# EAGLE board PCB_Micromouse_Final (EAGLE 9.7.0)
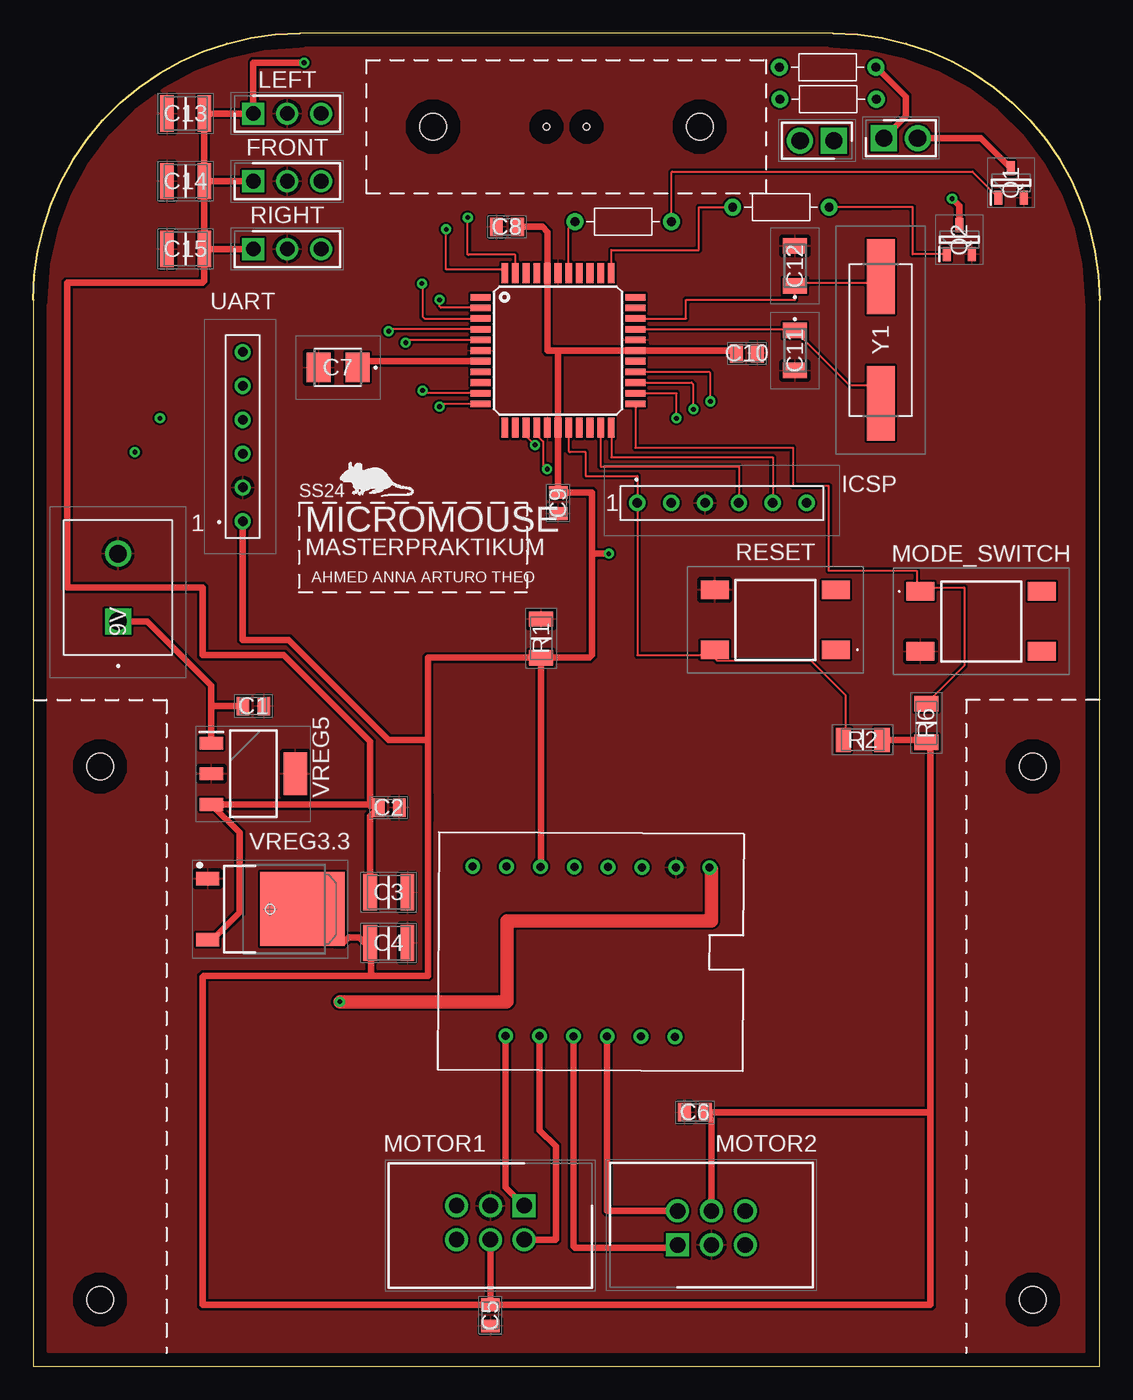
[diagram p0: board, top side]
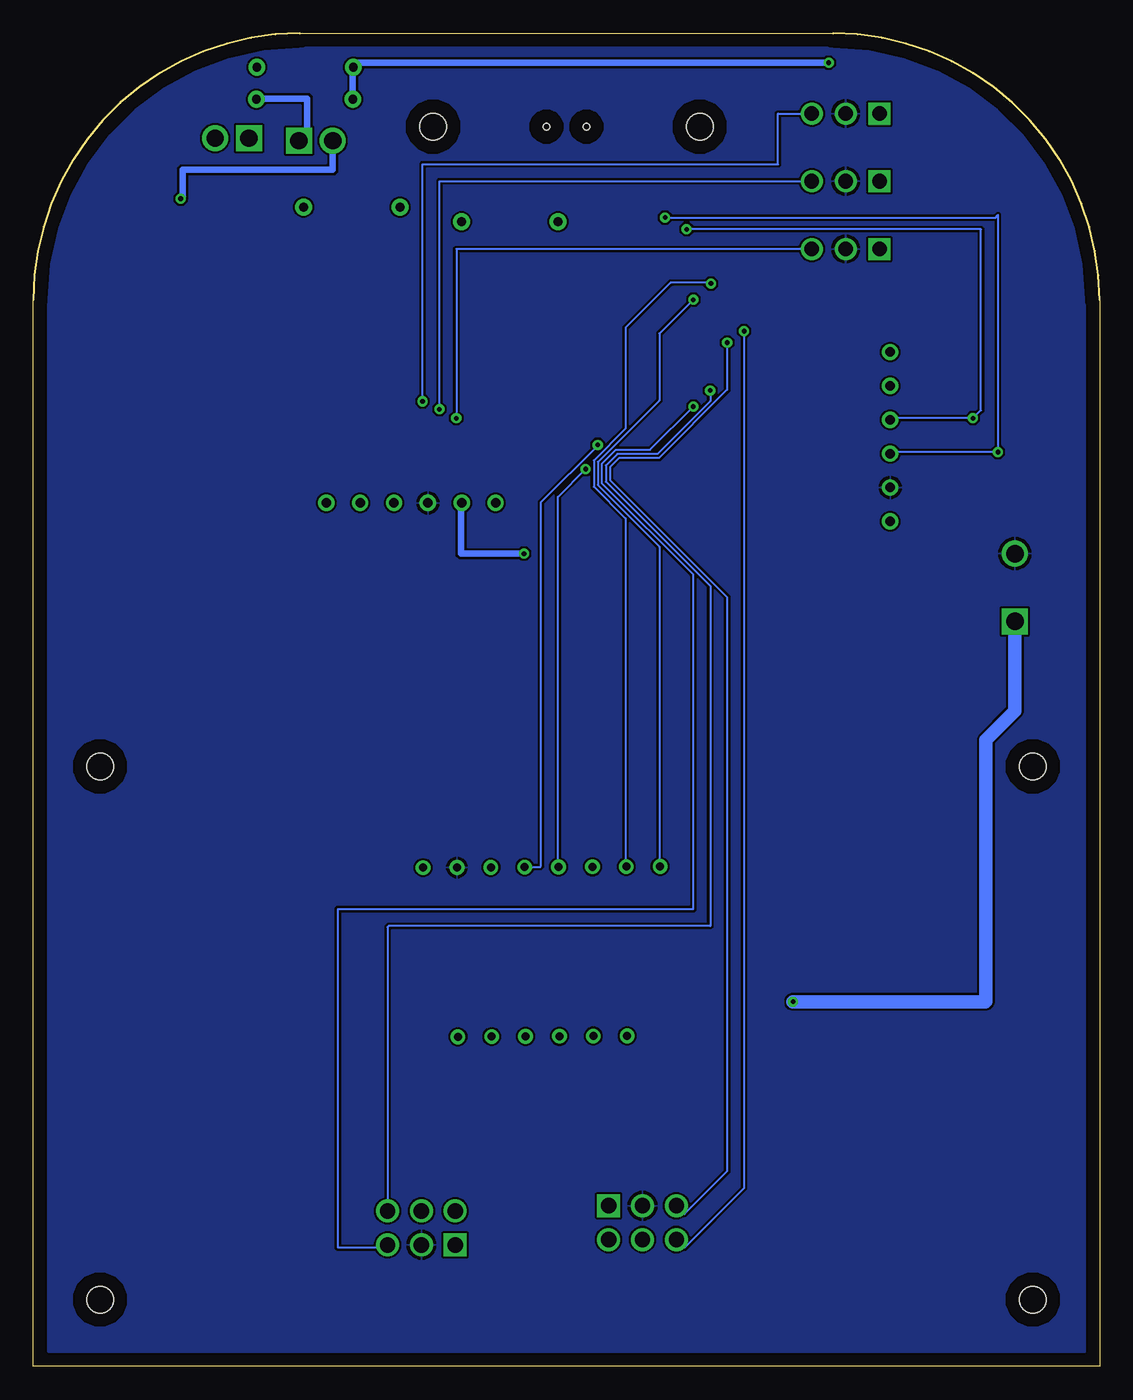
[diagram p1: board, bottom side, seen from below]

Size 80 x 100 mm. Coordinates in mm from the lower left corner, seen from the top.
Outline: 0,0 80,0 80,80 arc90 60,100 20,100 arc90 0,80 0,0
Copper layers (1*16): Top / Bottom
Stack-up Default Layer Stack: Top User Defined 0.035mm / Dielectric-1 User Defined 1.5mm / Bottom User Defined 0.035mm
Design rules: minimum copper width 6mil, minimum drill size 0.35mm, copper clearance wire_polygon to wire_polygon 6mil, copper clearance wire_polygon to pad_smd 6mil, copper clearance wire_polygon to via 6mil, copper clearance pad_smd to pad_smd 6mil, copper clearance pad_smd to via 6mil, copper clearance via to via 6mil, copper clearance smd to pad (same net) 6mil, copper clearance smd to via (same net) 6mil, copper clearance smd to smd (same net) 6mil, dimension clearance 40mil, via restrict clearance 0mil, restrict clearance 0mil, drill distance 6mil, keepout clearance 0mil
Holes 2 mm at 5,45 5,5 30,93 50,93 75,45 75,5
Holes 0.5 mm at 38.5,93 41.5,93

## Footprints (pad centres in the part's own frame; a part is rotated, then mirrored left to right if it is on the bottom)
1729128 = drill 1.3 pad 1.95 square: 1 0,0 | drill 1.3 pad 1.95: 2 5.08,0
CAPC2012X135N = smd 0.96 x 1.39: 1 -0.79,0; 2 0.79,0
CAPC3225X178N = smd 1.02 x 2.72: 1 -1.4,0; 2 1.4,0
T495T = smd 1.8 x 2.23: 1 -1.46,0; 2 1.46,0
C1206 = smd 1.15 x 1.8: 1 -1.5,0; 2 1.5,0
HDRV3W64P0X254_1X3_762X254X869 = drill 1.1 pad 1.65 square: 1 0,0 | drill 1.1 pad 1.65: 2 2.54,0; 3 5.08,0
TQFP44 = smd 1.5 x 0.5: 1 -5.8,4; 2 -5.8,3.2; 3 -5.8,2.4; 4 -5.8,1.6; 5 -5.8,0.8; 6 -5.8,0; 7 -5.8,-0.8; 8 -5.8,-1.6; 9 -5.8,-2.4; 10 -5.8,-3.2; 11 -5.8,-4; 23 5.8,-4; 24 5.8,-3.2; 25 5.8,-2.4; 26 5.8,-1.6; 27 5.8,-0.8; 28 5.8,0; 29 5.8,0.8; 30 5.8,1.6; 31 5.8,2.4; 32 5.8,3.2; 33 5.8,4 | smd 0.5 x 1.5: 12 -4,-5.8; 13 -3.2,-5.8; 14 -2.4,-5.8; 15 -1.6,-5.8; 16 -0.8,-5.8; 17 0,-5.8; 18 0.8,-5.8; 19 1.6,-5.8; 20 2.4,-5.8; 21 3.2,-5.8; 22 4,-5.8; 34 4,5.8; 35 3.2,5.8; 36 2.4,5.8; 37 1.6,5.8; 38 0.8,5.8; 39 0,5.8; 40 -0.8,5.8; 41 -1.6,5.8; 42 -2.4,5.8; 43 -3.2,5.8; 44 -4,5.8
SS-106-XX-2 = drill 0.71 pad 1.1: 1 0,0; 2 -2.54,0; 3 -5.08,0; 4 -7.62,0; 5 -10.16,0; 6 -12.7,0
HDRV2W110P0X254_1X2_508X254X85 = drill 1.3 pad 1.95 square: 1 0,0 | drill 1.3 pad 1.95: 2 2.54,0
TS046695BK160SMTTR = smd 2.1 x 1.4: 1 -4.55,2.25; 2 -4.55,-2.25; 3 4.55,2.25; 4 4.55,-2.25
SHDR6W67P254_2X3_1524X916X922P = drill 1.15 pad 1.725 square: 1 0,0 | drill 1.15 pad 1.725: 2 0,2.54; 3 2.54,0; 4 2.54,2.54; 5 5.08,0; 6 5.08,2.54
SOT95P230X110-3N = smd 1.05 x 0.6: 1 -1.1,0.95; 2 -1.1,-0.95; 3 1.1,0
RESC3216X65N = smd 1.15 x 1.8: 1 -1.45,0; 2 1.45,0
RESAD724W46L381D178B = drill 0.66 pad 1.26: 1 -3.62,0; 2 3.62,0
ADAFRUITPINHEADER = drill 0.6: AIN1 0,0; AIN2 0,2.54; AOUT1 12.7,2.54; AOUT2 12.7,5.08; AS 12.7,12.7; BIN1 0,10.16; BIN2 0,7.62; BOUT1 12.7,7.62; BOUT2 12.7,10.16; BS 12.7,15.24; FLT 0,12.7; GND 0,15.24; P$3 0,5.08; VM 0,17.78
TO228P991X238-3N = smd 1.75 x 1: 1 -4.7,2.285; 3 -4.7,-2.285 | smd 6.35 x 5.55: 4 2.4,0
SOT230P700X180-4N = smd 1.75 x 0.95: 1 -3.15,2.3; 2 -3.15,0; 3 -3.15,-2.3 | smd 1.75 x 3.2: 4 3.15,0
ABLS73728MHZK4T = smd 5.6 x 2.1: 1 -4.75,0; 2 4.75,0

## Placement (x,y rotation side)
9V  1729128  [1729128]  6.35,55.88 90 top
C1  MAASU21GSB7104KTCA01  [CAPC2012X135N]  16.51,49.53 0 top
C2  MAASU21GSB7104KTCA01  [CAPC2012X135N]  26.67,41.91 0 top
C3  KAF32LR71H106KL  [CAPC3225X178N]  26.67,35.56 0 top
C4  KAF32LR71H106KL  [CAPC3225X178N]  26.67,31.75 0 top
C5  MAASU21GSB7104KTCA01  [CAPC2012X135N]  34.29,3.81 270 top
C6  MAASU21GSB7104KTCA01  [CAPC2012X135N]  49.65,19.05 180 top
C7  T495T106M016ATE4K0  [T495T]  22.86,74.93 180 top
C8  MAASU21GSB7104KTCA01  [CAPC2012X135N]  35.53,85.48 180 top
C9  MAASU21GSB7104KTCA01  [CAPC2012X135N]  39.37,64.77 270 top
C10  MAASU21GSB7104KTCA01  [CAPC2012X135N]  53.54,76 180 top
C11  C1206C160G5GACTU  [C1206]  57.15,76.2 270 top
C12  C1206C160G5GACTU  [C1206]  57.15,82.55 90 top
C13  KAF32LR71H106KL  [CAPC3225X178N]  11.43,93.98 180 top
C14  KAF32LR71H106KL  [CAPC3225X178N]  11.43,88.9 180 top
C15  KAF32LR71H106KL  [CAPC3225X178N]  11.43,83.82 180 top
FRONT  61300311121  [HDRV3W64P0X254_1X3_762X254X869]  16.51,88.9 0 top
IC1  DSPIC33FJ64MC804-PT  [TQFP44]  39.37,76.2 0 top
ICSP  SS-106-G-2  [SS-106-XX-2]  45.32,64.77 180 top
J1  61300211121  [HDRV2W110P0X254_1X2_508X254X85]  63.82,92.13 0 top
J2  61300211121  [HDRV2W110P0X254_1X2_508X254X85]  60.07,91.95 180 top
LEFT  61300311121  [HDRV3W64P0X254_1X3_762X254X869]  16.51,93.98 0 top
MODE_SWITCH  TS04-66-95-BK-160-SMT-TR  [TS046695BK160SMTTR]  71.12,55.88 0 top
MOTOR1  1761681-1  [SHDR6W67P254_2X3_1524X916X922P]  36.83,12.04 180 top
MOTOR2  1761681-1  [SHDR6W67P254_2X3_1524X916X922P]  48.34,9.1 0 top
Q1  MMBT2222A,215  [SOT95P230X110-3N]  73.36,88.78 90 top
Q2  MMBT2222A,215  [SOT95P230X110-3N]  69.48,84.52 90 top
R1  KTR18EZPJ473  [RESC3216X65N]  38.1,54.61 90 top
R2  KTR18EZPJ473  [RESC3216X65N]  62.23,46.99 0 top
R3  [RESAD724W46L381D178B]  56.1,86.96 0.1 top
R4  [RESAD724W46L381D178B]  44.26,85.86 0 top
R5  [RESAD724W46L381D178B]  59.6,97.47 180 top
R6  KTR18EZPJ473  [RESC3216X65N]  67,48.26 270 top
R7  [RESAD724W46L381D178B]  59.65,95.06 180 top
RESET  TS04-66-95-BK-160-SMT-TR  [TS046695BK160SMTTR]  55.68,56 180 top
RIGHT  61300311121  [HDRV3W64P0X254_1X3_762X254X869]  16.51,83.82 0 top
U$3  ADAFRUITDRV833_PINHEADER  [ADAFRUITPINHEADER]  32.97,37.5 269.7 top
UART  SS-106-G-2  [SS-106-XX-2]  15.71,63.39 270 top
VREG3.3  LM1117DT-3.3_NOPB  [TO228P991X238-3N]  17.78,34.29 0 top
VREG5  LM7805MP_NOPB  [SOT230P700X180-4N]  16.51,44.45 0 top
Y1  ABLS-7.3728MHZ-K4T  [ABLS73728MHZK4T]  63.58,77 270 top

## Library data of the parts
9V = 1729128; DESCRIPTION: PCB terminal block, nominal current: 13.5 A, rated voltage (III/2): 400 V, nominal cross section: 1.5 mm?, Number of potentials: 2, Number of rows: 1, Number of positions per row: 2, product range: MKDSN 1,5, pitch: 5.08 mm, connection method: Screw connection with tension sleeve, mounting: Wave soldering, conductor/PCB connection direction: 0 ?, color: green, Pin layout: Linear pinning, Solder pin [P]: 3.5 mm, type of packaging: packed in cardboard; HEIGHT: 10.15mm; MANUFACTURER_NAME: Phoenix Contact; MANUFACTURER_PART_NUMBER: 1729128; MOUSER_PART_NUMBER: 651-1729128; MOUSER_PRICE-STOCK: https://www.mouser.co.uk/ProductDetail/Phoenix-Contact/1729128?qs=GFUSqQMLmmnCBVBY3dts9w%3D%3D
C1 = MAASU21GSB7104KTCA01; CAPACITANCE: 0.22uF; DESCRIPTION: Item Summary 0.1uF+/-10%, 50V, X7R, 0805/2012 (EIA/JIS) - Lifecycle Stage Mass Production - AEC-Q200 qualified - Standard packaging quantity (minimum) Taping Embossed 3000pcs; HEIGHT: 1.35mm; MANUFACTURER_NAME: TAIYO YUDEN; MANUFACTURER_PART_NUMBER: MAASU21GSB7104KTCA01; MOUSER_PART_NUMBER: 963-MAASU21GSB7104K; MOUSER_PRICE-STOCK: https://www.mouser.co.uk/ProductDetail/TAIYO-YUDEN/MAASU21GSB7104KTCA01?qs=HFfMDpzxxd1jTqboynuweA%3D%3D; NUMBER: C1
C2 = MAASU21GSB7104KTCA01; CAPACITANCE: 0.1uF; DESCRIPTION: Item Summary 0.1uF+/-10%, 50V, X7R, 0805/2012 (EIA/JIS) - Lifecycle Stage Mass Production - AEC-Q200 qualified - Standard packaging quantity (minimum) Taping Embossed 3000pcs; HEIGHT: 1.35mm; MANUFACTURER_NAME: TAIYO YUDEN; MANUFACTURER_PART_NUMBER: MAASU21GSB7104KTCA01; MOUSER_PART_NUMBER: 963-MAASU21GSB7104K; MOUSER_PRICE-STOCK: https://www.mouser.co.uk/ProductDetail/TAIYO-YUDEN/MAASU21GSB7104KTCA01?qs=HFfMDpzxxd1jTqboynuweA%3D%3D; NUMBER: C2
C3 = KAF32LR71H106KL; CAPACITANCE: 10uF; DESCRIPTION: Multilayer Ceramic Capacitors MLCC - SMD/SMT 50V 10uF X7R 1210 10% AEC-Q200 FLEXITERM; HEIGHT: 1.78mm; MANUFACTURER_NAME: Kyocera AVX; MANUFACTURER_PART_NUMBER: KAF32LR71H106KL; MOUSER_PART_NUMBER: 581-KAF32LR71H106KL; MOUSER_PRICE-STOCK: https://www.mouser.co.uk/ProductDetail/KYOCERA-AVX/KAF32LR71H106KL?qs=Jm2GQyTW%2FbjRFOhV%2FdegQw%3D%3D; NUMBER: C3
C4 = KAF32LR71H106KL; CAPACITANCE: 10uF; DESCRIPTION: Multilayer Ceramic Capacitors MLCC - SMD/SMT 50V 10uF X7R 1210 10% AEC-Q200 FLEXITERM; HEIGHT: 1.78mm; MANUFACTURER_NAME: Kyocera AVX; MANUFACTURER_PART_NUMBER: KAF32LR71H106KL; MOUSER_PART_NUMBER: 581-KAF32LR71H106KL; MOUSER_PRICE-STOCK: https://www.mouser.co.uk/ProductDetail/KYOCERA-AVX/KAF32LR71H106KL?qs=Jm2GQyTW%2FbjRFOhV%2FdegQw%3D%3D; NUMBER: C4
C5 = MAASU21GSB7104KTCA01; CAPACITANCE: 0.1uF; DESCRIPTION: Item Summary 0.1uF+/-10%, 50V, X7R, 0805/2012 (EIA/JIS) - Lifecycle Stage Mass Production - AEC-Q200 qualified - Standard packaging quantity (minimum) Taping Embossed 3000pcs; HEIGHT: 1.35mm; MANUFACTURER_NAME: TAIYO YUDEN; MANUFACTURER_PART_NUMBER: MAASU21GSB7104KTCA01; MOUSER_PART_NUMBER: 963-MAASU21GSB7104K; MOUSER_PRICE-STOCK: https://www.mouser.co.uk/ProductDetail/TAIYO-YUDEN/MAASU21GSB7104KTCA01?qs=HFfMDpzxxd1jTqboynuweA%3D%3D; NUMBER: C5
C6 = MAASU21GSB7104KTCA01; CAPACITANCE: 0.1uF; DESCRIPTION: Item Summary 0.1uF+/-10%, 50V, X7R, 0805/2012 (EIA/JIS) - Lifecycle Stage Mass Production - AEC-Q200 qualified - Standard packaging quantity (minimum) Taping Embossed 3000pcs; HEIGHT: 1.35mm; MANUFACTURER_NAME: TAIYO YUDEN; MANUFACTURER_PART_NUMBER: MAASU21GSB7104KTCA01; MOUSER_PART_NUMBER: 963-MAASU21GSB7104K; MOUSER_PRICE-STOCK: https://www.mouser.co.uk/ProductDetail/TAIYO-YUDEN/MAASU21GSB7104KTCA01?qs=HFfMDpzxxd1jTqboynuweA%3D%3D; NUMBER: C6
C7 = T495T106M016ATE4K0; DESCRIPTION: T495, Tantalum, MnO2 Tantalum, Commercial Grade, 10 uF, 20%, 16 VDC, 125C, -55C, 85C, SMD, MnO2, Molded, Low Profile, Low ESR, 8 % , 4 Ohms, 1600 nA, 63.89 mg, 3528, 1.1mm, Height Max = 1.2mm, 3000, 156 Weeks; HEIGHT: 1.2mm; MANUFACTURER_NAME: KEMET; MANUFACTURER_PART_NUMBER: T495T106M016ATE4K0; MOUSER_PART_NUMBER: 80-T495T106M16ATE4K0; MOUSER_PRICE-STOCK: https://www.mouser.co.uk/ProductDetail/KEMET/T495T106M016ATE4K0?qs=esDHISMOsl3qcQwgxBtW%252Bg%3D%3D
C8 = MAASU21GSB7104KTCA01; CAPACITANCE: 0.1uF; DESCRIPTION: Item Summary 0.1uF+/-10%, 50V, X7R, 0805/2012 (EIA/JIS) - Lifecycle Stage Mass Production - AEC-Q200 qualified - Standard packaging quantity (minimum) Taping Embossed 3000pcs; HEIGHT: 1.35mm; MANUFACTURER_NAME: TAIYO YUDEN; MANUFACTURER_PART_NUMBER: MAASU21GSB7104KTCA01; MOUSER_PART_NUMBER: 963-MAASU21GSB7104K; MOUSER_PRICE-STOCK: https://www.mouser.co.uk/ProductDetail/TAIYO-YUDEN/MAASU21GSB7104KTCA01?qs=HFfMDpzxxd1jTqboynuweA%3D%3D; NUMBER: C8
C9 = MAASU21GSB7104KTCA01; CAPACITANCE: 0.1uF; DESCRIPTION: Item Summary 0.1uF+/-10%, 50V, X7R, 0805/2012 (EIA/JIS) - Lifecycle Stage Mass Production - AEC-Q200 qualified - Standard packaging quantity (minimum) Taping Embossed 3000pcs; HEIGHT: 1.35mm; MANUFACTURER_NAME: TAIYO YUDEN; MANUFACTURER_PART_NUMBER: MAASU21GSB7104KTCA01; MOUSER_PART_NUMBER: 963-MAASU21GSB7104K; MOUSER_PRICE-STOCK: https://www.mouser.co.uk/ProductDetail/TAIYO-YUDEN/MAASU21GSB7104KTCA01?qs=HFfMDpzxxd1jTqboynuweA%3D%3D; NUMBER: C9
C10 = MAASU21GSB7104KTCA01; CAPACITANCE: 0.1uF; DESCRIPTION: Item Summary 0.1uF+/-10%, 50V, X7R, 0805/2012 (EIA/JIS) - Lifecycle Stage Mass Production - AEC-Q200 qualified - Standard packaging quantity (minimum) Taping Embossed 3000pcs; HEIGHT: 1.35mm; MANUFACTURER_NAME: TAIYO YUDEN; MANUFACTURER_PART_NUMBER: MAASU21GSB7104KTCA01; MOUSER_PART_NUMBER: 963-MAASU21GSB7104K; MOUSER_PRICE-STOCK: https://www.mouser.co.uk/ProductDetail/TAIYO-YUDEN/MAASU21GSB7104KTCA01?qs=HFfMDpzxxd1jTqboynuweA%3D%3D; NUMBER: C10
C11 = C1206C160G5GACTU; CAPACITANCE: 16pF; DESCRIPTION: SMD Comm C0G, Ceramic, 16 pF, 2%, 50 VDC, 125 VDC, 125C, -55C, C0G, SMD, MLCC, Ultra-Stable, Low Loss, Class I, 0.1 % , 100 GOhms, 15 mg, 1206, 3.2mm, 1.6mm, 0.78mm, 0.5mm, 4000, 78 Weeks, 120; HEIGHT: mm; MANUFACTURER_NAME: KEMET; MANUFACTURER_PART_NUMBER: C1206C160G5GACTU; NUMBER: C11
C12 = C1206C160G5GACTU; CAPACITANCE: 16pF; DESCRIPTION: SMD Comm C0G, Ceramic, 16 pF, 2%, 50 VDC, 125 VDC, 125C, -55C, C0G, SMD, MLCC, Ultra-Stable, Low Loss, Class I, 0.1 % , 100 GOhms, 15 mg, 1206, 3.2mm, 1.6mm, 0.78mm, 0.5mm, 4000, 78 Weeks, 120; HEIGHT: mm; MANUFACTURER_NAME: KEMET; MANUFACTURER_PART_NUMBER: C1206C160G5GACTU; NUMBER: C12
C13 = KAF32LR71H106KL; CAPACITANCE: 10uF; DESCRIPTION: Multilayer Ceramic Capacitors MLCC - SMD/SMT 50V 10uF X7R 1210 10% AEC-Q200 FLEXITERM; HEIGHT: 1.78mm; MANUFACTURER_NAME: Kyocera AVX; MANUFACTURER_PART_NUMBER: KAF32LR71H106KL; MOUSER_PART_NUMBER: 581-KAF32LR71H106KL; MOUSER_PRICE-STOCK: https://www.mouser.co.uk/ProductDetail/KYOCERA-AVX/KAF32LR71H106KL?qs=Jm2GQyTW%2FbjRFOhV%2FdegQw%3D%3D; NUMBER: C13
C14 = KAF32LR71H106KL; CAPACITANCE: 10uF; DESCRIPTION: Multilayer Ceramic Capacitors MLCC - SMD/SMT 50V 10uF X7R 1210 10% AEC-Q200 FLEXITERM; HEIGHT: 1.78mm; MANUFACTURER_NAME: Kyocera AVX; MANUFACTURER_PART_NUMBER: KAF32LR71H106KL; MOUSER_PART_NUMBER: 581-KAF32LR71H106KL; MOUSER_PRICE-STOCK: https://www.mouser.co.uk/ProductDetail/KYOCERA-AVX/KAF32LR71H106KL?qs=Jm2GQyTW%2FbjRFOhV%2FdegQw%3D%3D; NUMBER: C14
C15 = KAF32LR71H106KL; CAPACITANCE: 10uF; DESCRIPTION: Multilayer Ceramic Capacitors MLCC - SMD/SMT 50V 10uF X7R 1210 10% AEC-Q200 FLEXITERM; HEIGHT: 1.78mm; MANUFACTURER_NAME: Kyocera AVX; MANUFACTURER_PART_NUMBER: KAF32LR71H106KL; MOUSER_PART_NUMBER: 581-KAF32LR71H106KL; MOUSER_PRICE-STOCK: https://www.mouser.co.uk/ProductDetail/KYOCERA-AVX/KAF32LR71H106KL?qs=Jm2GQyTW%2FbjRFOhV%2FdegQw%3D%3D; NUMBER: C15
FRONT LEFT RIGHT = 61300311121; DESCRIPTION: HEADER 3 POSITION 2.54MM 0.100" VERTICLE UNSHROUDED BREAKAWAY THROUGH-HOLE; HEIGHT: 8.69mm; MANUFACTURER_NAME: Wurth Elektronik; MANUFACTURER_PART_NUMBER: 61300311121; MOUSER_PART_NUMBER: 710-61300311121; MOUSER_PRICE-STOCK: https://www.mouser.co.uk/ProductDetail/Wurth-Elektronik/61300311121?qs=PhR8RmCirEYxRWFJzNKsUw%3D%3D
IC1 = microchip-dspic33fjxxmc
ICSP UART = SS-106-G-2; DESCRIPTION: 6 Position, .100&quot; Single Row Screw Machine Socket Strip; HEIGHT: mm; MANUFACTURER_NAME: SAMTEC; MANUFACTURER_PART_NUMBER: SS-106-G-2; MOUSER_PART_NUMBER: 200-SS106G2; MOUSER_PRICE-STOCK: https://www.mouser.co.uk/ProductDetail/Samtec/SS-106-G-2?qs=XtX6y9BSeMjEQeehg9OM%2FQ%3D%3D
J1 J2 = 61300211121; DESCRIPTION: WURTH ELEKTRONIK - 61300211121 - HEADER, 2.54MM, PIN, THT, VERTICAL, 2WAY; HEIGHT: 8.54mm; MANUFACTURER_NAME: Wurth Elektronik; MANUFACTURER_PART_NUMBER: 61300211121; MOUSER_PART_NUMBER: 710-61300211121; MOUSER_PRICE-STOCK: https://www.mouser.co.uk/ProductDetail/Wurth-Elektronik/61300211121?qs=t4813l51qx%252B1A5GYDQxPlw%3D%3D
MODE_SWITCH RESET = TS04-66-95-BK-160-SMT-TR; DESCRIPTION: Tactile Switches 6 x 6 mm 9.5 mm Actuator Height 160 gf Black Surface Mount TR SPST Tactile; HEIGHT: 9.7mm; MANUFACTURER_NAME: CUI Devices; MANUFACTURER_PART_NUMBER: TS04-66-95-BK-160-SMT-TR; MOUSER_PART_NUMBER: 179-TS046695BK160SMR; MOUSER_PRICE-STOCK: https://www.mouser.co.uk/ProductDetail/CUI-Devices/TS04-66-95-BK-160-SMT-TR?qs=VJzv269c%252BPZ4T0IrjAQJjg%3D%3D
MOTOR1 = 1761681-1; DESCRIPTION: Body Features: Primary Product Color Black | Connector Profile Low | Daisy Chain With | Configuration Features: PCB Mount Orientation Vertical | Number of Positions 6 | Number of Rows 2 | Contact Features: Contact Mating Area Plating Material Thickness 15 MICIN | Contact Type Pin | PCB Contact Termination Area Plating Material Tin | Contact Base Material Phosphor Bronze | PCB Contact Termination Area Plating Material Thickness 100 MICIN | Contact Current Rating (Max) 1 AMP | Contact Underplating Material Ni; HEIGHT: 9.22mm; MANUFACTURER_NAME: TE Connectivity; MANUFACTURER_PART_NUMBER: 1761681-1; MOUSER_PART_NUMBER: 571-1761681-1; MOUSER_PRICE-STOCK: https://www.mouser.co.uk/ProductDetail/TE-Connectivity/1761681-1?qs=BqFpTYCQ3dLAeZ2wzdz7aw%3D%3D; NUMBER: Motor1
MOTOR2 = 1761681-1; DESCRIPTION: Body Features: Primary Product Color Black | Connector Profile Low | Daisy Chain With | Configuration Features: PCB Mount Orientation Vertical | Number of Positions 6 | Number of Rows 2 | Contact Features: Contact Mating Area Plating Material Thickness 15 MICIN | Contact Type Pin | PCB Contact Termination Area Plating Material Tin | Contact Base Material Phosphor Bronze | PCB Contact Termination Area Plating Material Thickness 100 MICIN | Contact Current Rating (Max) 1 AMP | Contact Underplating Material Ni; HEIGHT: 9.22mm; MANUFACTURER_NAME: TE Connectivity; MANUFACTURER_PART_NUMBER: 1761681-1; MOUSER_PART_NUMBER: 571-1761681-1; MOUSER_PRICE-STOCK: https://www.mouser.co.uk/ProductDetail/TE-Connectivity/1761681-1?qs=BqFpTYCQ3dLAeZ2wzdz7aw%3D%3D; NUMBER: Motor2
Q1 Q2 = MMBT2222A_215; DESCRIPTION: Bipolar (BJT) Transistor NPN 40 V 600 mA 300MHz 250 mW Surface Mount TO-236AB; HEIGHT: 1.1mm; MANUFACTURER_NAME: Nexperia; MANUFACTURER_PART_NUMBER: MMBT2222A,215; MOUSER_PART_NUMBER: 771-MMBT2222A215; MOUSER_PRICE-STOCK: https://www.mouser.co.uk/ProductDetail/Nexperia/MMBT2222A215?qs=LOCUfHb8d9sLd6ictNLvig%3D%3D
R1 R2 R6 = KTR18EZPJ473; ATTRIBUTE: 47KOhm; DESCRIPTION: Thick Film Resistors - SMD 1206 47Kohm 5% High VoltageAEC-Q200; HEIGHT: 0.65mm; MANUFACTURER_NAME: ROHM Semiconductor; MANUFACTURER_PART_NUMBER: KTR18EZPJ473; MOUSER_PART_NUMBER: 755-KTR18EZPJ473; MOUSER_PRICE-STOCK: https://www.mouser.co.uk/ProductDetail/ROHM-Semiconductor/KTR18EZPJ473?qs=DyUWGjl%252BcVsDG4J5n26UhA%3D%3D
R3-R5 R7 = Resistor; CATEGORY: Resistor; SUB-CATEGORY: Fixed
U$3 = Adafruit pin header
VREG3.3 = LM1117DT-3.3_NOPB; DESCRIPTION: Space saving 800-mA low-dropout linear regulator with internal current limit; HEIGHT: 2.38mm; MANUFACTURER_NAME: Texas Instruments; MANUFACTURER_PART_NUMBER: LM1117DT-3.3/NOPB; MOUSER_PART_NUMBER: 926-LM1117DT-3.3NOPB; MOUSER_PRICE-STOCK: https://www.mouser.co.uk/ProductDetail/Texas-Instruments/LM1117DT-3.3-NOPB?qs=X1J7HmVL2ZHOT670myqy2w%3D%3D; NAM: LM1117
VREG5 = LM7805MP_NOPB; DESCRIPTION: 1.5-A, Wide VIN Fixed Voltage Regulators; HEIGHT: 1.8mm; MANUFACTURER_NAME: Texas Instruments; MANUFACTURER_PART_NUMBER: LM7805MP/NOPB; MOUSER_PART_NUMBER: 595-LM7805MP/NOPB; MOUSER_PRICE-STOCK: https://www.mouser.co.uk/ProductDetail/Texas-Instruments/LM7805MP-NOPB?qs=gO6GG99qvRBdJUhXh1Qrhw%3D%3D; NUMBER: LM7805
Y1 = ABLS-7.3728MHZ-K4T; DESCRIPTION: IoT OPTIMIZED LOW PROFILE QUARTZ CRYSTAL; HEIGHT: 4.2mm; MANUFACTURER_NAME: ABRACON; MANUFACTURER_PART_NUMBER: 7.3728MHZ Crystal Osc.; MOUSER_PART_NUMBER: 815-ABLS-7.37MK4-T; MOUSER_PRICE-STOCK: https://www.mouser.co.uk/ProductDetail/ABRACON/ABLS-7.3728MHZ-K4T?qs=uDmhV2jwPReaiEAs5bxjfg%3D%3D

## Nets
+3.3V: C4.1 C5.1 C6.1 C8.1 C9.1 C10.2 IC1.17 IC1.28 IC1.40 ICSP.2 MOTOR1.4 MOTOR2.4 R1.1 R2.2 R6.2 U$3.P$3 UART.1 VREG3.3.4
+5V: C2.1 C3.1 C13.1 C14.1 C15.1 FRONT.1 LEFT.1 R5.2 R7.2 RIGHT.1 VREG3.3.3 VREG5.3
+9V: 9V.1 C1.1 U$3.VM VREG5.1
GND: 9V.2 C1.2 C2.2 C3.2 C4.2 C5.2 C6.2 C7.2 C8.2 C9.2 C10.1 C11.2 C12.2 C13.2 C14.2 C15.2 FRONT.2 IC1.6 IC1.16 IC1.29 IC1.39 ICSP.3 LEFT.2 MODE_SWITCH.2 MOTOR1.3 MOTOR2.3 Q1.2 Q2.2 R1.2 RESET.4 RIGHT.2 U$3.GND UART.2 VREG3.3.1 VREG5.2 VREG5.4
ICSP_CLOCK: IC1.22 ICSP.5
ICSP_DATA: IC1.21 ICSP.4
LED1: IC1.38 R4.1
LED2: IC1.34 R3.1
M1+: MOTOR1.2 U$3.AOUT2
M1-: MOTOR1.1 U$3.AOUT1
M1_A: IC1.4 MOTOR1.6
M1_B: IC1.5 MOTOR1.5
M1_PWM_H: IC1.2 U$3.AIN1
M1_PWM_L: IC1.3 U$3.AIN2
M2+: MOTOR2.2 U$3.BOUT2
M2-: MOTOR2.1 U$3.BOUT1
M2_A: IC1.10 MOTOR2.6
M2_B: IC1.11 MOTOR2.5
M2_PWM_H: IC1.14 U$3.BIN1
M2_PWM_L: IC1.15 U$3.BIN2
MCLR: IC1.18 ICSP.1 R2.1 RESET.3
MODE_SWITCH: IC1.23 MODE_SWITCH.1 R6.1
N$1: J2.2 Q2.3
N$2: J1.2 Q1.3
N$3: Q2.1 R3.2
N$4: Q1.1 R4.2
N$5: J2.1 R7.1
N$6: J1.1 R5.1
OSC1: C11.1 IC1.30 Y1.2
OSC2: C12.1 IC1.31 Y1.1
RXD: IC1.44 UART.4
SFRONT: FRONT.3 IC1.25
SLEFT: IC1.26 LEFT.3
SRIGHT: IC1.24 RIGHT.3
TXD: IC1.43 UART.3
VCAP/VDDCORE: C7.1 IC1.7

## Tracks (layer width: path | path; a pad name or v marks a point on that pad's centre or on a via)
+3.3V  (via drill 0.35)
  Top 0.152: 38.1,37.47 U$3.P$3 | 25.27,29.21 25.34,29.3 | 12.79,29.3 12.7,29.21 | 66.82,46.99 R6.2 | 29.54,29.3 29.6,29.3 | 19.05,54.5 19.16,54.5 | 52.55,76.2 C10.2 | 25.34,31.68 C4.1 | 41.91,53.34 41.73,53.16
  Top 0.2: 22.72,31.75 VREG3.3.4
  Top 0.5: 22.72,31.75 23.24,31.75 23.66,32.17 24.45,32.17 24.87,31.75 C4.1 | R1.1 29.6,53.16 29.6,46.99 | 25.34,29.3 29.54,29.3 | R1.1 38.1,37.47 | 25.34,29.3 12.79,29.3 | 12.7,29.21 12.7,4.6 C5.1 | MOTOR1.4 C5.1 | MOTOR2.4 50.88,18.49 C6.1 67.31,19.05 | 67.31,19.05 67.31,4.6 C5.1 | 67.31,19.05 67.31,46.8 R6.2 | R2.2 66.82,46.99 | 41.91,60.96 41.91,53.34 | 41.91,60.96 41.91,65.56 C9.1 IC1.17 39.37,76.2 | 29.6,46.99 29.6,42.78 29.61,42.77 29.61,41.05 29.6,41.04 29.6,29.3 | UART.1 15.71,54.5 19.05,54.5 | 19.16,54.5 26.67,46.99 29.6,46.99 | v43.18,60.96 41.91,60.96 | 39.37,76.2 IC1.28 52.55,76.2 | 39.37,76.2 38.57,76.2 IC1.40 38.57,85.1 38.19,85.48 C8.1 | 25.34,29.3 25.34,31.68 | 41.73,53.16 R1.1
  Bottom 0.152: ICSP.2 47.9,64.73
  Bottom 0.5: v43.18,60.96 47.9,60.96 47.9,64.73
+5V  (via drill 0.35)
  Top 0.152: 25.27,42.02 25.4,42.15 | 12.83,81.41 12.7,81.28
  Top 0.2: 25.64,42.15 C2.1 | VREG3.3.3 13.46,32.01
  Top 0.5: 25.64,42.15 25.4,42.15 VREG5.3 15.48,40.03 15.48,34.03 13.46,32.01 | 25.27,42.02 25.27,46.86 18.79,53.34 12.7,53.34 12.7,58.42 2.54,58.42 2.54,81.28 12.7,81.28 | C14.1 FRONT.1 | C15.1 RIGHT.1 | C15.1 12.83,81.41 | C14.1 C13.1 LEFT.1 16.51,97.79 v20.32,97.79 | C14.1 C15.1 | C3.1 25.27,41.3 C2.1
  Bottom 0.152: 56.05,97.79 56.06,97.78 | 56.06,97.55 R5.2 56.03,97.42
  Bottom 0.5: v20.32,97.79 56.05,97.79 | 56.06,97.78 56.06,97.55 | 56.03,97.42 R7.2
+9V  (via drill 0.35)
  Top 0.152: 35.52,27.34 35.56,27.38
  Top 0.5: 9V.1 8.56,55.88 13.36,51.08 13.36,49.53 | 13.36,49.53 VREG5.1 | C1.1 13.36,49.53
  Top 1: v23,27.34 35.52,27.34 | U$3.VM 50.88,37.27 50.88,33.42 35.56,33.42 35.56,27.38
  Bottom 0.152: 8.56,27.34 8.52,27.38 | 8.52,47 8.52,46.74
  Bottom 1: v23,27.34 8.56,27.34 | 8.52,27.38 8.52,46.74 | 9V.1 6.35,49.17 8.52,47
GND
  pour Top: 0,50 0,0 80,0 80,50 80,80 arc90 60,100 20,100 arc90 0,80
  pour Bottom: 0,50 0,0 80,0 80,50 80,80 arc90 60,100 20,100 arc90 0,80
ICSP_CLOCK
  Top 0.152: IC1.22 43.37,68.2 55.49,68.2 55.48,68.19 ICSP.5
ICSP_DATA
  Top 0.152: IC1.21 42.57,67.5 52.95,67.5 52.94,67.49 ICSP.4
LED1
  Top 0.152: IC1.38 40.17,85.39 R4.1
LED2
  Top 0.152: IC1.34 43.37,83.74 49.94,83.74 49.94,86.95 R3.1
M1+
  Top 0.152: 39.2,9.5 | 38,17.71 37.98,17.71
  Top 0.5: 37.98,17.71 U$3.AOUT2 | 39.2,9.5 39.2,16.51 38,17.71 | MOTOR1.2 39.2,9.5
M1-
  Top 0.152: 35.44,13.43 35.56,13.31
  Top 0.5: U$3.AOUT1 35.44,22.86 35.44,13.43 | 35.56,13.31 MOTOR1.1
M1_A  (via drill 0.35)
  Top 0.152: IC1.4 26.82,77.8 v26.67,77.65
  Bottom 0.152: MOTOR1.6 31.14,8.89 26.67,13.36 v26.67,77.65
M1_B  (via drill 0.35)
  Top 0.152: IC1.5 28.13,77 v27.94,76.8
  Bottom 0.152: MOTOR1.5 31.14,11.43 27.94,14.63 27.94,57.7 36.73,66.49 36.73,67.46 36.04,68.14 33.05,68.14 27.94,73.25 v27.94,76.8
M1_PWM_H  (via drill 0.35)
  Top 0.152: IC1.2 30.58,79.4 30.48,79.5 v30.48,80.01
  Bottom 0.152: U$3.AIN1 33.02,37.55 33.02,61.49 37.64,66.11 37.64,67.83 33.02,72.46 33.02,77.47 v30.48,80.01
M1_PWM_L  (via drill 0.35)
  Top 0.152: IC1.3 29.35,78.6 29.21,78.74 29.21,81.18 v29.16,81.23
  Bottom 0.152: v29.16,81.23 29.21,81.28 32.18,81.28 35.56,77.9 35.56,70.35 37.95,67.96 37.95,65.98 35.56,63.6 35.56,37.53 U$3.AIN2
M2+
  Top 0.5: MOTOR2.2 43.06,11.64 U$3.BOUT2
M2-
  Top 0.152: MOTOR2.1 48.13,8.89 | 40.64,8.89 40.52,9.01
  Top 0.5: 48.13,8.89 40.64,8.89 | 40.52,9.01 U$3.BOUT1
M2_A  (via drill 0.35)
  Top 0.152: IC1.10 29.41,73 v29.21,73.2
  Bottom 0.152: MOTOR2.6 53.42,32.94 53.34,33.02 29.21,33.02 29.21,58.54 37.03,66.36 37.03,67.58 36.17,68.45 33.18,68.45 29.21,72.41 v29.21,73.2
M2_B  (via drill 0.35)
  Top 0.152: IC1.11 30.68,72.2 v30.48,72
  Bottom 0.152: MOTOR2.5 53.63,8.89 57.15,8.89 57.15,34.29 30.48,34.29 30.48,59.38 37.34,66.24 37.34,67.71 36.3,68.75 33.73,68.75 v30.48,72
M2_PWM_H  (via drill 0.35)
  Top 0.152: IC1.14 36.97,69.8 v37.65,69.12
  Bottom 0.152: U$3.BIN1 41.97,37.44 41.91,37.5 41.91,64.81 37.65,69.08 v37.65,69.12
M2_PWM_L  (via drill 0.35)
  Top 0.152: IC1.15 37.77,69.86 38.26,69.37 38.26,67.61 v38.55,67.31
  Bottom 0.152: U$3.BIN2 40.64,37.51 40.64,65.22 v38.55,67.31
MCLR
  Top 0.152: R2.1 60.96,47.17 60.96,50.31 58.36,52.91 51.32,52.91 50.8,53.42 | 50.8,53.42 RESET.3 | 50.8,53.42 50.72,53.34 45.32,53.34 ICSP.1 45.32,66.8 41.44,66.8 41.44,68.58 40.25,68.58 40.17,68.66 IC1.18
MODE_SWITCH
  Top 0.152: R6.1 69.85,52.56 69.85,58.42 66.86,58.42 MODE_SWITCH.1 66.28,58.42 66.28,59.69 59.69,59.69 59.69,66.04 57,66.04 57,68.9 45.17,68.9 IC1.23
N$1  (via drill 0.35)
  Top 0.5: v68.94,87.6 69.48,87.06 Q2.3
  Bottom 0.5: v68.94,87.6 68.8,87.74 68.8,89.76 57.53,89.76 J2.2
N$2
  Top 0.152: 73.27,89.97 Q1.3
  Top 0.5: J1.2 71.11,92.13 73.27,89.97
N$3
  Top 0.152: Q2.1 65.98,83.42 65.98,86.96 64.52,86.96 | 64.52,86.96 | 64.52,86.96 R3.2
N$4
  Top 0.152: Q1.1 70.47,89.62 47.93,89.62 47.88,89.57 R4.2
N$5
  Bottom 0.5: R7.1 63.22,95.11 59.45,95.11 59.45,92.57 J2.1
N$6
  Top 0.152: R5.1 63.27,97.47
  Top 0.5: J1.1 65.48,93.79 65.48,95.26 63.27,97.47
OSC1
  Top 0.152: Y1.2 63.58,73.58 61.27,73.58 C11.1 57.05,77.8 IC1.30
OSC2
  Top 0.152: IC1.31 48.98,78.6 48.98,80.01 57.15,80.01 C12.1 57.38,81.28 63.5,81.28 63.58,81.36 Y1.1
RXD  (via drill 0.35)
  Top 0.152: IC1.44 35.09,82.28 30.98,82.28 v30.98,85.3
  Bottom 0.152: UART.4 15.6,71.12 v9.5,71.12 8.89,71.73 8.89,85.3 v30.98,85.3
SFRONT  (via drill 0.35)
  Top 0.152: v49.53,71.8 49.53,73.66 49.39,73.8 IC1.25
  Bottom 0.152: v49.53,71.8 49.53,88.9 FRONT.3
SLEFT  (via drill 0.35)
  Top 0.152: v50.8,72.39 50.8,74.5 50.7,74.6 IC1.26
  Bottom 0.152: v50.8,72.39 50.8,90.17 24.13,90.17 24.13,93.98 LEFT.3
SRIGHT  (via drill 0.35)
  Top 0.152: v48.26,71.12 48.26,73 IC1.24
  Bottom 0.152: RIGHT.3 48.26,83.82 v48.26,71.12
TXD  (via drill 0.35)
  Top 0.152: IC1.43 36.17,83.35 36.14,83.38 32.66,83.38 32.64,83.36 32.6,83.4 v32.6,86.18
  Bottom 0.152: UART.3 15.6,68.58 v7.62,68.58 7.62,86.36 7.8,86.18 v32.6,86.18
VCAP/VDDCORE
  Top 0.152: 24.6,75.4 24.13,74.93 C7.1
  Top 0.5: IC1.7 24.6,75.4

## Text on the board
SilkscreenTop: 1 | 1
NamesTop: SS24 | MICROMOUSE | MASTERPRAKTIKUM | AHMED ANNA ARTURO THEO